# EAGLE board Gesamt (EAGLE 6.6.0)
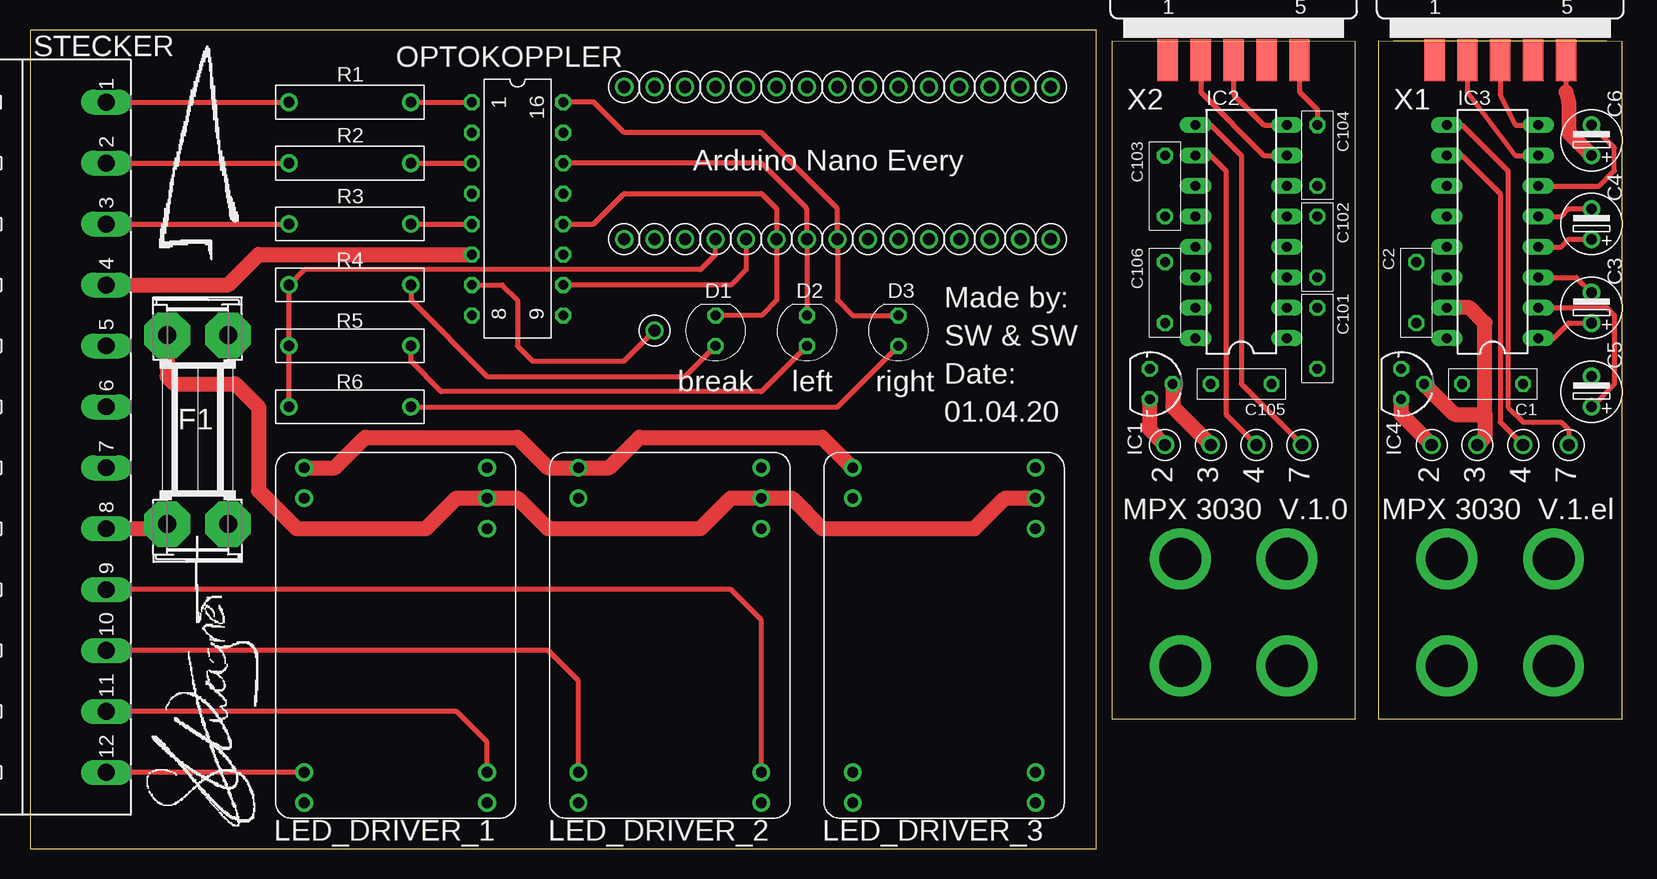
[diagram p0: board, top side]
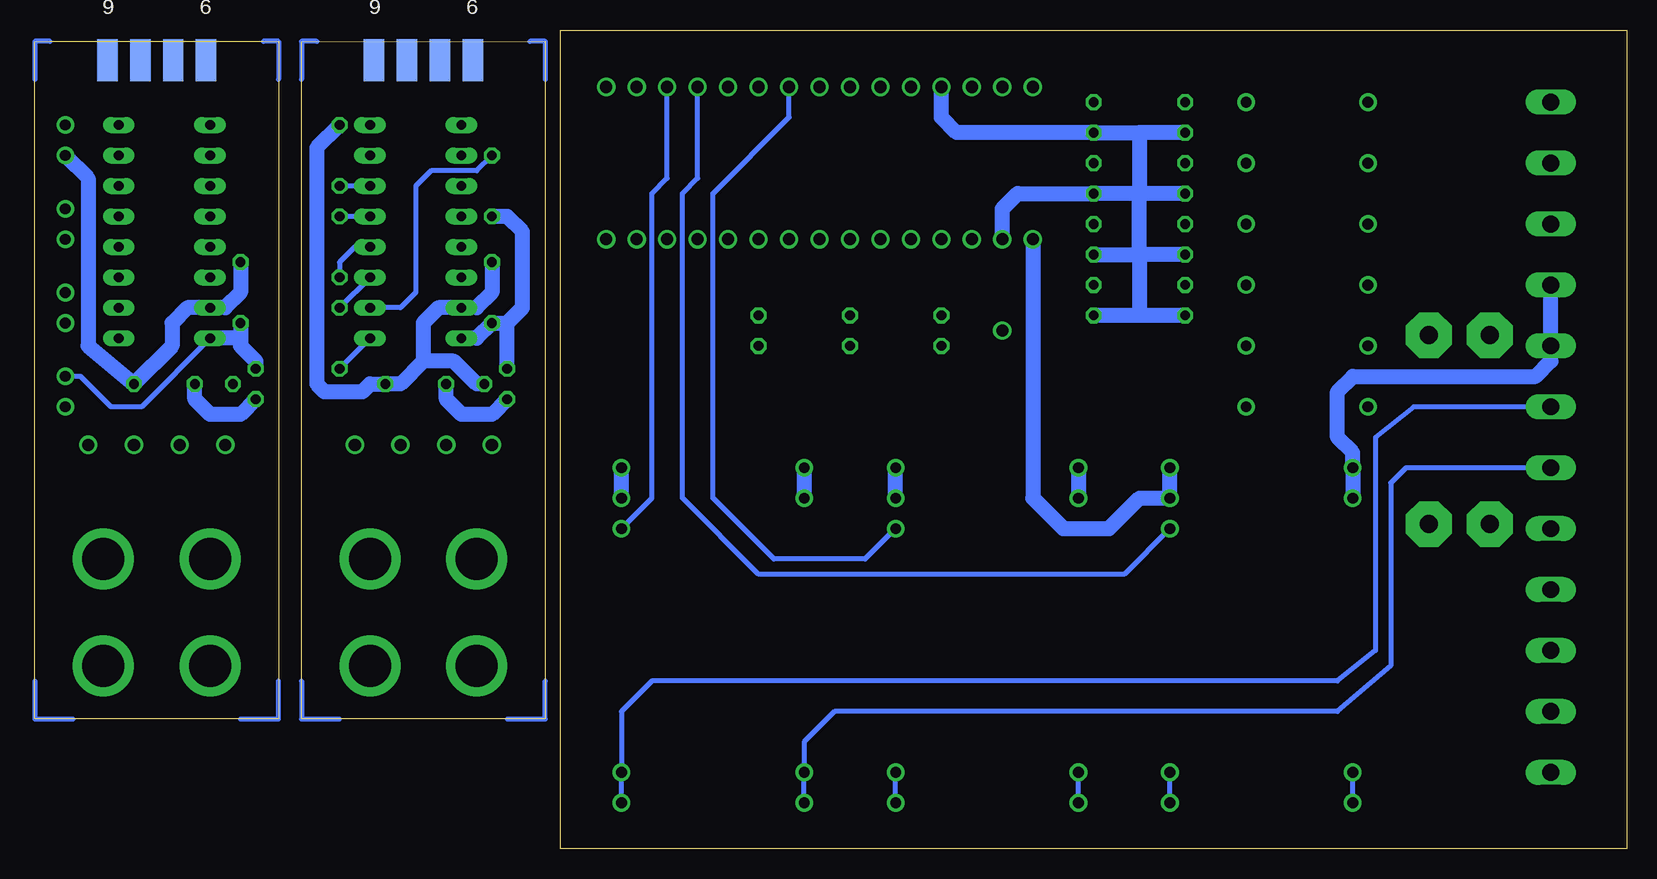
[diagram p1: board, bottom side, seen from below]

Size 132.72 x 68.25 mm. Coordinates in mm from the lower left corner, seen from the top.
Outline: 0,0 88.88,0 88.88,68.25 0,68.25 0,0
Outline: 110.49,10.79 110.49,67.29 90.17,67.31 90.17,10.79 110.49,10.79
Outline: 132.72,10.79 132.72,67.29 112.39,67.31 112.39,10.79 132.72,10.79
Copper layers (1*16): Top 0.035mm / dielectric 1.5mm / Bottom 0.035mm
Design rules "default *": minimum track width 10mil, minimum drill 24mil, track to track 8mil, track to pad 8mil, pad to pad 8mil, via to via 8mil, smd to smd 8mil, copper to edge 40mil, drill to drill 8mil, minimum pad ring 10mil, minimum via ring 8mil, stop-mask expansion 4mil, vias tented up to drill 0mil, thermal gap 10mil

## Footprints (pad centres in the part's own frame; a part is rotated, then mirrored left to right if it is on the bottom)
TP_10 = drill 1.016: P$1 0,0
C050-025X075 = drill 0.813 octagon: 1 -2.54,0; 2 2.54,0
ES-2,5L = drill 0.9 pad 1.473: 1 0,0; 2 2.54,0
THT3MM = drill 0.813 octagon: A -1.27,0; K 1.27,0
SHK20Q = drill 1.5 pad 3.81 octagon: 1A -7.874,2.54; 1B -7.874,-2.54; 2A 7.874,2.54; 2B 7.874,-2.54
78LXX = drill 0.813 octagon: GND 0,1.905; IN 1.27,0; OUT -1.27,0
DIL16 = drill 0.813 long: 1 -8.89,-3.81; 2 -6.35,-3.81; 3 -3.81,-3.81; 4 -1.27,-3.81; 5 1.27,-3.81; 6 3.81,-3.81; 7 6.35,-3.81; 8 8.89,-3.81; 9 8.89,3.81; 10 6.35,3.81; 11 3.81,3.81; 12 1.27,3.81; 13 -1.27,3.81; 14 -3.81,3.81; 15 -6.35,3.81; 16 -8.89,3.81
LDD-H = drill 0.9 pad 1.473: +VIN@1 -12.7,7.62; +VIN@2 -10.16,7.62; +VOUT@1 12.7,7.62; +VOUT@2 15.24,7.62; -VIN@1 -12.7,-7.62; -VIN@2 -10.16,-7.62; -VOUT@1 12.7,-7.62; -VOUT@2 15.24,-7.62; DIMM -7.62,7.62
DIL16' = drill 0.813 octagon: 1 -8.89,-3.81; 2 -6.35,-3.81; 3 -3.81,-3.81; 4 -1.27,-3.81; 5 1.27,-3.81; 6 3.81,-3.81; 7 6.35,-3.81; 8 8.89,-3.81; 9 8.89,3.81; 10 6.35,3.81; 11 3.81,3.81; 12 1.27,3.81; 13 -1.27,3.81; 14 -3.81,3.81; 15 -6.35,3.81; 16 -8.89,3.81
R-10 = drill 0.9 pad 1.473: 1 -5.08,0; 2 5.08,0
MSTBA12 = drill 1.397 long: 1 -27.94,5.08; 2 -22.86,5.08; 3 -17.78,5.08; 4 -12.7,5.08; 5 -7.62,5.08; 6 -2.54,5.08; 7 2.54,5.08; 8 7.62,5.08; 9 12.7,5.08; 10 17.78,5.08; 11 22.86,5.08; 12 27.94,5.08
TP_35 = drill 3.5 pad 5.08: TP_35 0,0
F09D = smd 1.7 x 3.5: 1 -5.486,-6.045; 2 -2.743,-6.045; 3 0,-6.045; 4 2.743,-6.045; 5 5.486,-6.045 | smd 1.7 x 3.5 bottom: 6 -4.115,-6.045; 7 -1.372,-6.045; 8 1.372,-6.045; 9 4.115,-6.045

## Placement (x,y rotation side)
1  [TP_10]  116.84,33.66 90 top
2  [TP_10]  94.61,33.66 90 top
3  [TP_10]  98.42,33.66 90 top
4  [TP_10]  102.23,33.66 90 top
5  [TP_10]  120.65,33.66 90 top
5V  TP_10"  [TP_10]  57.15,50.8 0 top
6  [TP_10]  128.27,33.66 90 top
7  [TP_10]  106.05,33.66 90 top
8  [TP_10]  124.46,33.66 90 top
A4  TP_10"  [TP_10]  67.31,50.8 180 top
A5  TP_10"  [TP_10]  64.77,50.8 180 top
A6  TP_10"  [TP_10]  62.23,50.8 180 top
A7  TP_10"  [TP_10]  59.69,50.8 180 top
C1  [C050-025X075]  121.92,38.73 180 top
C2  [C050-025X075]  115.57,46.35 270 top
C3  1µ  [ES-2,5L]  130.18,43.81 90 top
C4  1µ  [ES-2,5L]  130.18,50.8 90 top
C5  10µ  [ES-2,5L]  130.18,36.83 90 top
C6  10µ  [ES-2,5L]  130.18,57.78 90 top
C101  100n  [C050-025X075]  107.31,42.55 270 top
C102  [C050-025X075]  107.31,50.16 270 top
C103  [C050-025X075]  94.61,55.24 270 top
C104  [C050-025X075]  107.31,57.78 90 top
C105  [C050-025X075]  100.97,38.73 180 top
C106  [C050-025X075]  94.61,46.35 270 top
D1  THT3MM  [THT3MM]  57.15,43.18 90 top
D2  THT3MM  [THT3MM]  64.77,43.18 90 top
D3  THT3MM  [THT3MM]  72.39,43.18 90 top
D6  TP_10"  [TP_10]  69.85,63.5 0 top
D9  TP_10"  [TP_10]  77.47,63.5 0 top
D10  TP_10"  [TP_10]  80.01,63.5 0 top
F1  1.6A  [SHK20Q]  13.97,34.92 90 top
GND_1  TP_10"  [TP_10]  57.15,63.5 180 top
GND_2  TP_10"  [TP_10]  52.07,50.8 180 top
IC1  78L05  [78LXX]  93.34,38.73 270 top
IC2  MAX3232CPE  [DIL16]  100.97,51.44 90 top
IC3  MAX3232CPE  [DIL16]  121.92,51.44 90 top
IC4  78L05  [78LXX]  114.3,38.73 270 top
LED_DRIVER_1  LDD-H  [LDD-H]  30.48,19.05 270 top
LED_DRIVER_2  LDD-H  [LDD-H]  53.34,19.05 270 top
LED_DRIVER_3  LDD-H  [LDD-H]  76.2,19.05 270 top
OPTOKOPPLER  ILQ620  [DIL16']  40.64,53.34 270 top
R1  2,2k  [R-10]  26.67,62.23 0 top
R2  2,2k  [R-10]  26.67,57.15 0 top
R3  2,2k  [R-10]  26.67,52.07 0 top
R4  2,2k  [R-10]  26.67,46.99 180 top
R5  2,2k  [R-10]  26.67,41.91 180 top
R6  2,2k  [R-10]  26.67,36.83 180 top
STECKER  MSTBA12  [MSTBA12]  1.27,34.29 270 top
TESTPUNKT  TP_10"  [TP_10]  52.07,43.18 0 top
U$1  [TP_35]  95.89,15.24 90 top
U$2  [TP_35]  95.89,24.13 90 top
U$3  [TP_35]  104.78,15.24 90 top
U$4  [TP_35]  104.78,24.13 90 top
U$5  [TP_35]  118.11,15.24 90 top
U$6  [TP_35]  118.11,24.13 90 top
U$7  TP_10"  [TP_10]  85.09,63.5 180 top
U$8  [TP_35]  127,15.24 90 top
U$9  [TP_35]  127,24.13 90 top
U$39  TP_10"  [TP_10]  72.39,50.8 0 top
U$40  TP_10"  [TP_10]  54.61,50.8 0 top
U$41  TP_10"  [TP_10]  69.85,50.8 0 top
U$42  TP_10"  [TP_10]  72.39,63.5 0 top
U$43  TP_10"  [TP_10]  74.93,63.5 0 top
U$44  TP_10"  [TP_10]  82.55,63.5 0 top
U$45  TP_10"  [TP_10]  85.09,50.8 0 top
U$46  TP_10"  [TP_10]  82.55,50.8 0 top
U$47  TP_10"  [TP_10]  80.01,50.8 0 top
U$48  TP_10"  [TP_10]  77.47,50.8 0 top
U$49  TP_10"  [TP_10]  74.93,50.8 0 top
U$50  TP_10"  [TP_10]  49.53,63.5 0 top
U$51  TP_10"  [TP_10]  54.61,63.5 0 top
U$52  TP_10"  [TP_10]  59.69,63.5 0 top
U$53  TP_10"  [TP_10]  62.23,63.5 0 top
U$54  TP_10"  [TP_10]  64.77,63.5 0 top
U$55  TP_10"  [TP_10]  67.31,63.5 0 top
U$56  TP_10"  [TP_10]  52.07,63.5 0 top
VIN  TP_10"  [TP_10]  49.53,50.8 180 top
X1  [F09D]  122.56,71.75 0 top
X2  [F09D]  100.33,71.75 0 top

## Library data of the parts
1-5 5V 6-8 A4-A7 D6 D9 D10 GND_1 GND_2 TESTPUNKT U$1-U$9 U$39-U$56 VIN = SUPPLY
C1-C6 C101-C106 R1-R6 = R-C
D1-D3 = LED
F1 = fuse; OC_FARNELL: unknown; OC_NEWARK: unknown
IC1 IC4 = v-reg
IC2 IC3 = maxim; MF: MAXIM; MPN: MAX3232CPE+; OC_FARNELL: 9724494; OC_NEWARK: 68K4626
LED_DRIVER_1-LED_DRIVER_3 = SPEZIAL
OPTOKOPPLER = optocoupler
STECKER = con-phoenix-508; MPN: 1757349; OC_FARNELL: 3705250; OC_NEWARK: 71C4169
X1 X2 = con-subd; OC_FARNELL: unknown; OC_NEWARK: unknown

## Nets
+5V: 5V.P$1 R4.2 R5.2 R6.2
+5V1: C103.2 C106.2 IC1.OUT IC2.16
+5V2: C2.2 C5.2 IC3.16 IC4.OUT
+12V: F1.2A LED_DRIVER_1.+VIN@1 LED_DRIVER_1.+VIN@2 LED_DRIVER_2.+VIN@1 LED_DRIVER_2.+VIN@2 LED_DRIVER_3.+VIN@1 LED_DRIVER_3.+VIN@2 VIN.P$1
+VOUT_1: LED_DRIVER_1.+VOUT@1 LED_DRIVER_1.+VOUT@2 STECKER.11
+VOUT_2: LED_DRIVER_2.+VOUT@1 LED_DRIVER_2.+VOUT@2 STECKER.9
+VOUT_3: LED_DRIVER_3.+VOUT@1 LED_DRIVER_3.+VOUT@2 STECKER.6
-VOUT_1: LED_DRIVER_1.-VOUT@1 LED_DRIVER_1.-VOUT@2 STECKER.12
-VOUT_2: LED_DRIVER_2.-VOUT@1 LED_DRIVER_2.-VOUT@2 STECKER.10
-VOUT_3: LED_DRIVER_3.-VOUT@1 LED_DRIVER_3.-VOUT@2 STECKER.7
A_CABLE_PIN_1: 6.P$1 IC3.9
A_CABLE_PIN_7: 7.P$1 IC2.9
A_DSUB: IC2.8 X2.3
A_DSUB1: IC3.8 X1.3
B_CABLE_PIN_1: 8.P$1 IC3.10
B_CABLE_PIN_4: 4.P$1 IC2.10
B_DSUB: IC2.7 X2.2
B_DSUB1: IC3.7 X1.2
CABLE_PIN_1: 1.P$1 C1.2 IC4.IN
CABLE_PIN_2: 2.P$1 C105.2 IC1.IN
DIMMER_1: D9.P$1 LED_DRIVER_1.DIMM
DIMMER_2: D6.P$1 LED_DRIVER_2.DIMM
DIMMER_3: D10.P$1 LED_DRIVER_3.DIMM
GND: GND_1.P$1 GND_2.P$1 LED_DRIVER_1.-VIN@1 LED_DRIVER_1.-VIN@2 LED_DRIVER_2.-VIN@1 LED_DRIVER_2.-VIN@2 LED_DRIVER_3.-VIN@1 LED_DRIVER_3.-VIN@2 OPTOKOPPLER.2 OPTOKOPPLER.4 OPTOKOPPLER.6 OPTOKOPPLER.8 OPTOKOPPLER.9 OPTOKOPPLER.11 OPTOKOPPLER.13 OPTOKOPPLER.15 STECKER.4 STECKER.5
GND1: 3.P$1 C104.2 C105.1 C106.1 IC1.GND IC2.15 X2.5
GND2: 5.P$1 C1.1 C2.1 C6.1 IC3.15 IC4.GND X1.5
LED_1: D1.A R4.1
LED_2: D2.A R5.1
LED_3: D3.A R6.1
N$1: F1.1A STECKER.8
N$3: C3.1 IC3.1
N$4: C3.2 IC3.3
N$5: C4.1 IC3.4
N$6: C4.2 IC3.5
N$7: C5.1 IC3.2
N$8: C6.2 IC3.6
N$21: C101.2 IC2.1
N$22: C101.1 IC2.3
N$23: C102.2 IC2.4
N$24: C102.1 IC2.5
N$25: C103.1 IC2.2
N$26: C104.1 IC2.6
RESERVE_1: OPTOKOPPLER.7 TESTPUNKT.P$1
RESERVE_2: A7.P$1 OPTOKOPPLER.10
SCH_LI_2: OPTOKOPPLER.3 R2.2
SCH_LI_3: A5.P$1 D2.K OPTOKOPPLER.14
SCH_RE_2: OPTOKOPPLER.1 R1.2
SCH_RE_3: A4.P$1 D3.K OPTOKOPPLER.16
SCH_RUE_2: OPTOKOPPLER.5 R3.2
SCH_RUE_3: A6.P$1 D1.K OPTOKOPPLER.12
SCHALTER_LI_1: R2.1 STECKER.2
SCHALTER_RE_1: R1.1 STECKER.1
SCHALTER_RUE_1: R3.1 STECKER.3

## Tracks (layer width: path | path; a pad name or v marks a point on that pad's centre or on a via)
+5V
  Top 0.406: R6.2 R5.2 R4.2 22.86,48.26 55.88,48.26 57.15,49.53 5V.P$1
+5V1
  Bottom 1.27: IC1.OUT 93.34,43.81 | IC2.16 95.89,42.55 C106.2 93.34,43.81 | 93.34,43.81 92.08,45.09 92.08,51.44 93.34,52.7 C103.2
+5V2
  Bottom 0.406: IC3.16 123.83,36.83 126.36,36.83 128.91,39.37 C5.2
  Bottom 1.27: C2.2 115.57,42.55 | 115.57,42.55 IC3.16 | 115.57,42.55 115.57,41.91 114.3,40.64 IC4.OUT
+12V
  Top 1.27: LED_DRIVER_3.+VIN@2 81.28,29.21 78.74,26.67 66.04,26.67 63.5,29.21 LED_DRIVER_2.+VIN@2 58.42,29.21 55.88,26.67 43.18,26.67 40.64,29.21 LED_DRIVER_1.+VIN@2 35.56,29.21 33.02,26.67 22.23,26.67 19.05,29.84 19.05,36.83 17.14,38.73 12.06,38.73 11.43,39.37 F1.2A
  Bottom 1.27: LED_DRIVER_1.+VIN@1 LED_DRIVER_1.+VIN@2 40.64,29.21 43.18,26.67 46.99,26.67 49.53,29.21 VIN.P$1 | LED_DRIVER_2.+VIN@2 LED_DRIVER_2.+VIN@1 | LED_DRIVER_3.+VIN@2 LED_DRIVER_3.+VIN@1
+VOUT_1
  Top 0.406: LED_DRIVER_1.+VOUT@1 38.1,8.89 35.56,11.43 STECKER.11
  Bottom 0.406: LED_DRIVER_1.+VOUT@2 LED_DRIVER_1.+VOUT@1
+VOUT_2
  Top 0.406: LED_DRIVER_2.+VOUT@1 60.96,19.05 58.42,21.59 STECKER.9
  Bottom 0.406: LED_DRIVER_2.+VOUT@2 LED_DRIVER_2.+VOUT@1
+VOUT_3
  Bottom 0.406: LED_DRIVER_3.+VOUT@2 LED_DRIVER_3.+VOUT@1 83.82,11.43 81.28,13.97 24.13,13.97 20.95,16.51 20.95,34.29 17.78,36.83 STECKER.6
-VOUT_1
  Top 0.406: LED_DRIVER_1.-VOUT@1 STECKER.12
  Bottom 0.406: LED_DRIVER_1.-VOUT@2 LED_DRIVER_1.-VOUT@1
-VOUT_2
  Top 0.406: LED_DRIVER_2.-VOUT@1 45.72,13.97 43.18,16.51 STECKER.10
  Bottom 0.406: LED_DRIVER_2.-VOUT@2 LED_DRIVER_2.-VOUT@1
-VOUT_3
  Bottom 0.406: LED_DRIVER_3.-VOUT@2 LED_DRIVER_3.-VOUT@1 68.58,8.89 66.04,11.43 24.13,11.43 19.68,15.24 19.68,30.48 18.41,31.75 STECKER.7
A_CABLE_PIN_1
  Top 0.406: IC3.9 119.38,60.33 123.19,56.52 123.19,36.83 124.46,35.56 127.64,35.56 128.27,34.92 6.P$1
A_CABLE_PIN_7
  Top 0.406: IC2.9 98.42,60.33 100.97,57.78 100.97,38.73 7.P$1
A_DSUB
  Top 0.406: X2.3 100.33,62.87 102.87,60.33 IC2.8
A_DSUB1
  Top 0.406: X1.3 122.56,62.87 123.83,60.33 IC3.8
B_CABLE_PIN_1
  Top 0.406: IC3.10 119.38,57.78 122.56,54.61 122.56,35.56 8.P$1
B_CABLE_PIN_4
  Top 0.406: IC2.10 98.42,57.78 99.69,56.52 99.69,36.2 4.P$1
B_DSUB
  Top 0.406: X2.2 97.59,63.07 102.87,57.78 IC2.7
B_DSUB1
  Top 0.406: X1.2 119.81,63.07 123.83,57.78 IC3.7
CABLE_PIN_1
  Top 1.27: 1.P$1 114.3,36.2 IC4.IN
  Bottom 1.27: IC4.IN 115.57,36.2 118.11,36.2 119.38,37.47 C1.2
CABLE_PIN_2
  Top 1.27: 2.P$1 93.34,34.92 IC1.IN
  Bottom 1.27: IC1.IN 94.61,36.2 97.16,36.2 98.42,37.47 C105.2
DIMMER_1
  Bottom 0.406: LED_DRIVER_1.DIMM 41.91,22.86 72.39,22.86 78.74,29.21 78.74,54.61 77.47,55.88 D9.P$1
DIMMER_2
  Bottom 0.406: LED_DRIVER_2.DIMM 63.5,24.13 71.12,24.13 76.2,29.21 76.2,54.61 69.85,60.96 D6.P$1
DIMMER_3
  Bottom 0.406: LED_DRIVER_3.DIMM 81.28,29.21 81.28,54.61 80.01,55.88 D10.P$1
GND
  Top 1.27: LED_DRIVER_3.-VIN@1 66.04,34.29 50.8,34.29 48.26,31.75 LED_DRIVER_2.-VIN@1 43.18,31.75 40.64,34.29 27.94,34.29 25.4,31.75 LED_DRIVER_1.-VIN@1 | STECKER.4 16.51,46.99 19.05,49.53 OPTOKOPPLER.6
  Bottom 1.27: 40.64,59.69 OPTOKOPPLER.15 55.88,59.69 57.15,60.96 GND_1.P$1 | 40.64,59.69 40.64,54.61 | 40.64,54.61 OPTOKOPPLER.13 50.8,54.61 52.07,53.34 GND_2.P$1 | OPTOKOPPLER.11 40.64,49.53 | 40.64,49.53 40.64,54.61 | OPTOKOPPLER.2 40.64,59.69 | OPTOKOPPLER.6 40.64,49.53 | 40.64,49.53 40.64,44.45 | 40.64,44.45 OPTOKOPPLER.9 | OPTOKOPPLER.8 40.64,44.45 | OPTOKOPPLER.4 40.64,54.61 | STECKER.4 STECKER.5 6.35,40.64 7.62,39.37 22.86,39.37 24.13,38.1 24.13,34.29 22.86,33.02 LED_DRIVER_1.-VIN@1 LED_DRIVER_1.-VIN@2 | LED_DRIVER_2.-VIN@1 LED_DRIVER_2.-VIN@2 | LED_DRIVER_3.-VIN@1 LED_DRIVER_3.-VIN@2
GND1
  Top 0.406: X2.5 105.82,63.09 107.31,61.59 C104.2
  Top 1.27: IC1.GND 95.25,36.83 3.P$1
  Bottom 0.406: 95.89,45.09 IC2.15
  Bottom 1.27: C106.1 94.61,46.35 95.89,45.09 | IC2.15 99.06,45.09 100.33,43.81 100.33,40.64 | 100.33,40.64 102.23,38.73 C105.1 104.78,38.73 105.41,38.1 108.58,38.1 109.22,38.73 109.22,58.42 C104.2 | IC1.GND 95.89,38.73 97.79,40.64 100.33,40.64
GND2
  Top 0.406: X1.5 128.04,63.09
  Top 1.27: 128.04,63.09 128.27,62.23 128.27,59.69 C6.1 | 5.P$1 121.28,34.29 121.28,36.2 | IC4.GND 118.75,36.2 121.28,36.2 | 121.28,36.2 121.28,43.81 120.02,45.09 IC3.15
  Bottom 1.27: C2.1 115.57,46.35 116.84,45.09 IC3.15 120.02,45.09 121.28,43.81 121.28,41.91 C1.1 128.27,41.91 128.27,55.88 C6.1
LED_1
  Top 0.406: R4.1 31.75,45.72 38.1,39.37 54.61,39.37 D1.A
LED_2
  Top 0.406: D2.A 60.96,38.1 34.29,38.1 31.75,40.64 R5.1
LED_3
  Top 0.406: R6.1 67.31,36.83 D3.A
N$1
  Top 1.27: STECKER.8 11.05,26.67 F1.1A
N$2
  Bottom 0.406: 93.34,10.79 90.17,10.79 90.17,13.97 | 107.31,10.79 110.49,10.79 110.49,13.97 | 90.17,64.14 90.17,67.31 91.44,67.31 | 110.49,64.14 110.49,67.31 109.22,67.31
N$3
  Top 0.406: IC3.1 127,42.55 128.27,43.81 C3.1
N$4
  Top 0.406: IC3.3 128.91,47.62 C3.2
N$5
  Top 0.406: IC3.4 127.64,50.16 128.27,50.8 C4.1
N$6
  Top 0.406: IC3.5 127.64,52.7 128.27,53.34 C4.2
N$7
  Top 0.406: IC3.2 131.44,45.09 132.08,44.45 132.08,38.73 C5.1
N$8
  Top 0.406: IC3.6 130.81,55.24 132.08,56.52 132.08,58.42 C6.2
N$9  (3 unrouted)
  Bottom 0.406: 115.57,10.79 112.39,10.79 112.39,13.97 | 129.54,10.79 132.72,10.79 132.72,13.97 | 112.39,64.14 112.39,67.31 113.67,67.31 | 132.72,64.14 132.72,67.31 131.44,67.31
N$21
  Bottom 0.406: IC2.1 C101.2
N$22
  Bottom 0.406: IC2.3 C101.1
N$23
  Bottom 0.406: IC2.4 106.05,50.16 107.31,48.9 C102.2
N$24
  Bottom 0.406: IC2.5 C102.1
N$25
  Bottom 0.406: C103.1 95.89,56.52 99.69,56.52 100.97,55.24 100.97,46.35 102.23,45.09 IC2.2
N$26
  Bottom 0.406: IC2.6 C104.1
RESERVE_1
  Top 0.406: TESTPUNKT.P$1 49.53,40.64 41.91,40.64 40.64,41.91 40.64,45.72 39.37,46.99 OPTOKOPPLER.7
RESERVE_2
  Top 0.406: A7.P$1 59.69,48.26 58.42,46.99 OPTOKOPPLER.10
SCH_LI_2
  Top 0.406: R2.2 OPTOKOPPLER.3
SCH_LI_3
  Top 0.406: D2.K A5.P$1 64.77,53.34 60.96,57.15 OPTOKOPPLER.14
SCH_RE_2
  Top 0.406: R1.2 OPTOKOPPLER.1
SCH_RE_3
  Top 0.406: D3.K 68.58,44.45 67.31,45.72 A4.P$1 67.31,53.34 60.96,59.69 49.53,59.69 46.99,62.23 OPTOKOPPLER.16
SCH_RUE_2
  Top 0.406: R3.2 OPTOKOPPLER.5
SCH_RUE_3
  Top 0.406: D1.K 60.96,44.45 62.23,45.72 A6.P$1 62.23,53.34 60.96,54.61 49.53,54.61 46.99,52.07 OPTOKOPPLER.12
SCHALTER_LI_1
  Top 0.406: STECKER.2 R2.1
SCHALTER_RE_1
  Top 0.406: STECKER.1 R1.1
SCHALTER_RUE_1
  Top 0.406: STECKER.3 R3.1

## Text on the board
tPlace: Arduino Nano Every | Made by: | SW & SW | Date: | break | left | right | 01.04.20
tNames: 2 | 3 | 4 | 7 | 2 | 3 | 4 | 7 | MPX 3030 V.1.0 | MPX 3030 V.1.el